# Altium PCB testbobot.PcbDoc
Units mil, origin at the board's own origin, x right, y up, seen from the top; angles counter-clockwise.
Board outline 3937.01 x 3937.01 mil, 2 copper layers (Top Layer, Bottom Layer); 55 components, 47 nets, 221 pads, 0 vias.
Unrouted connection lines stored in the file: 145.
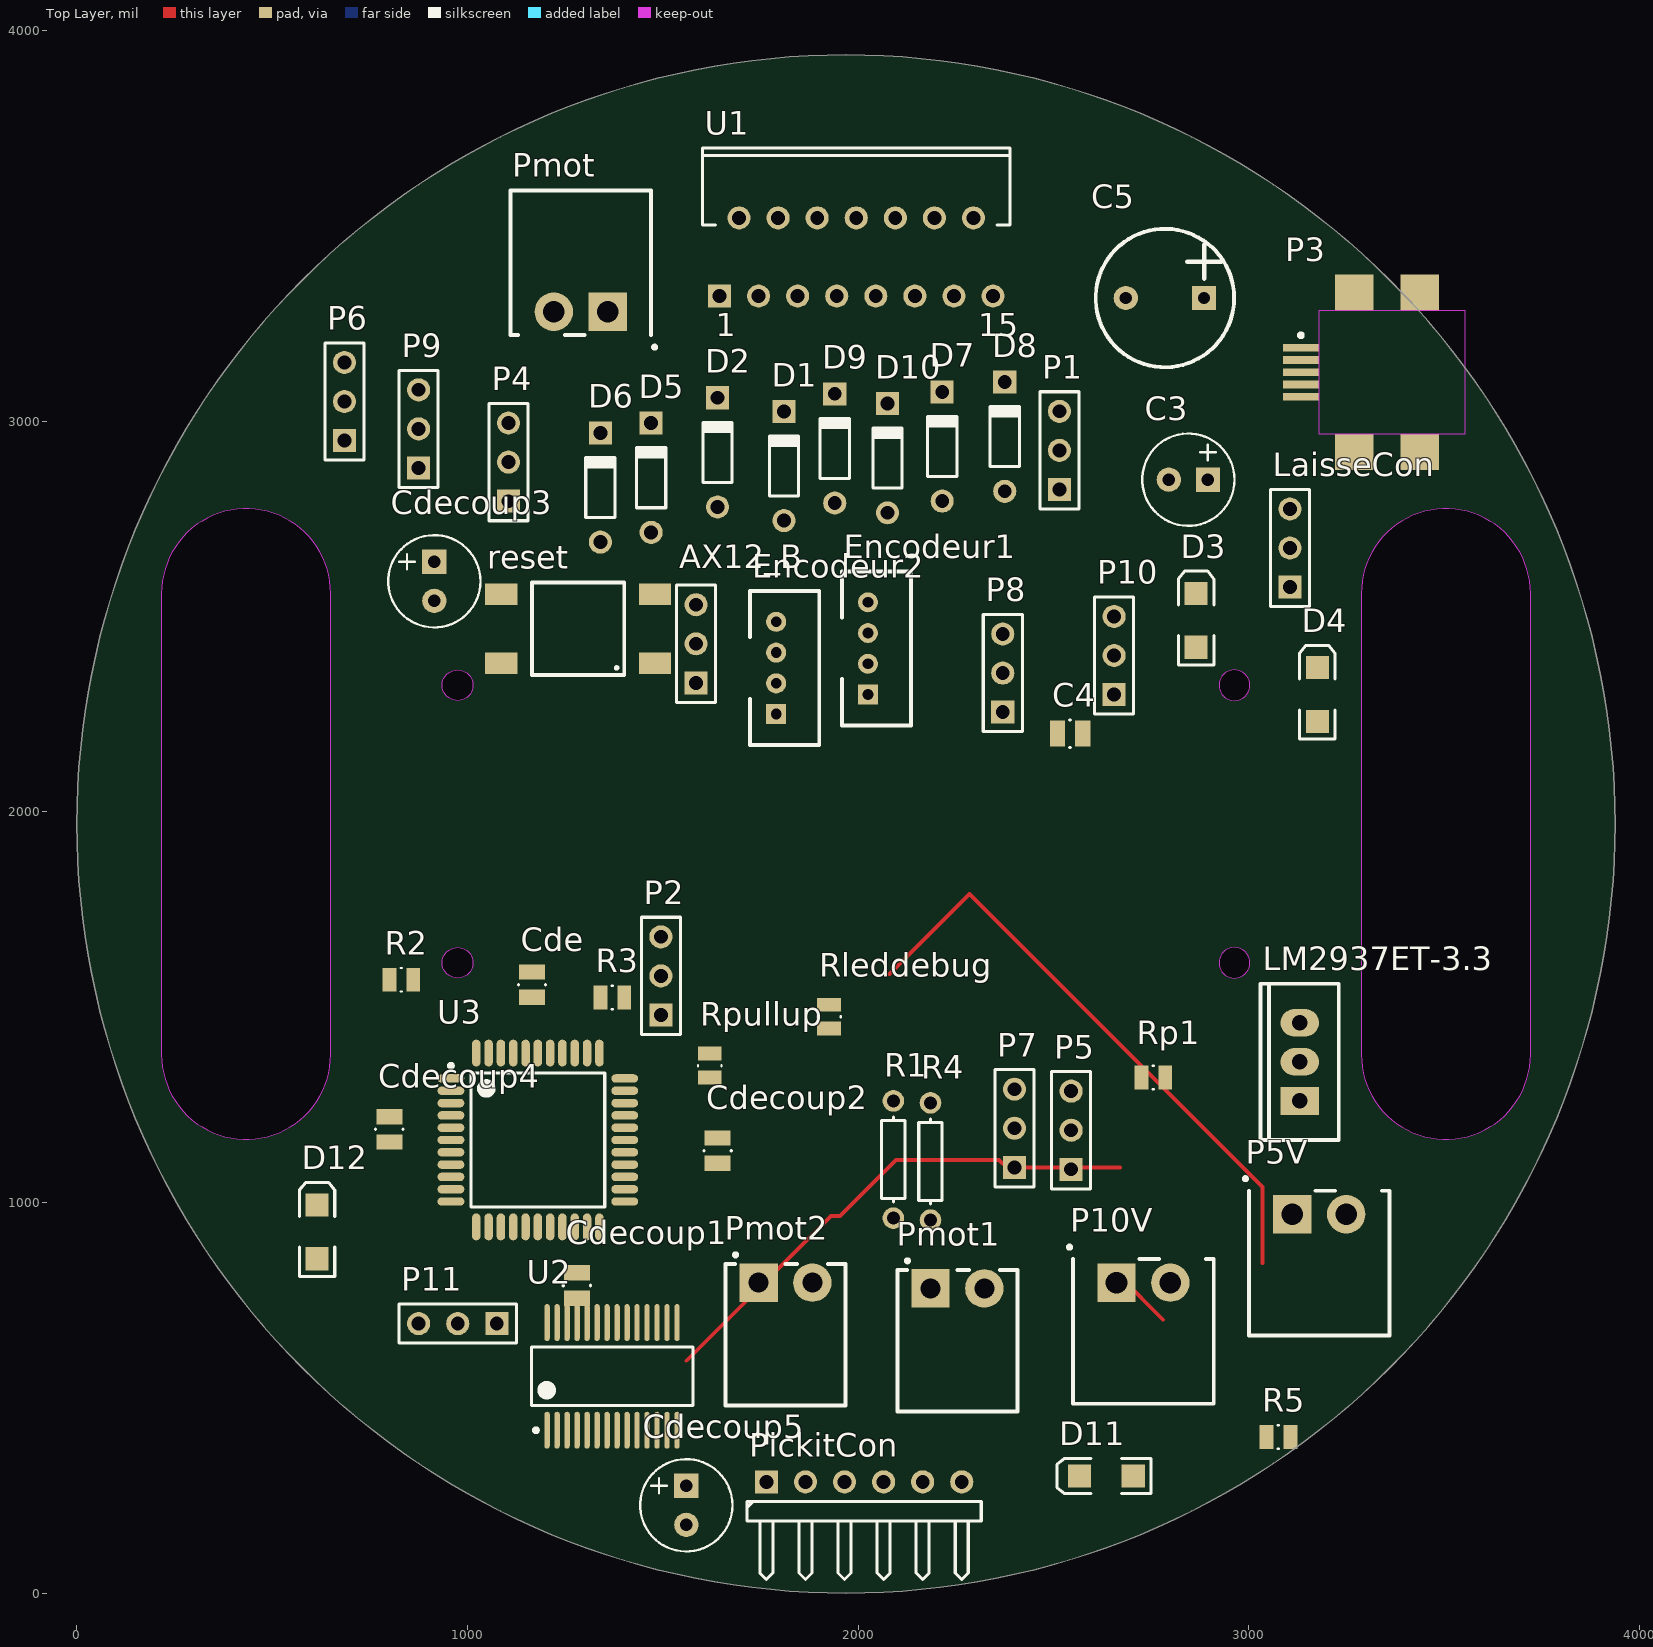
[diagram p0: Top Layer view]
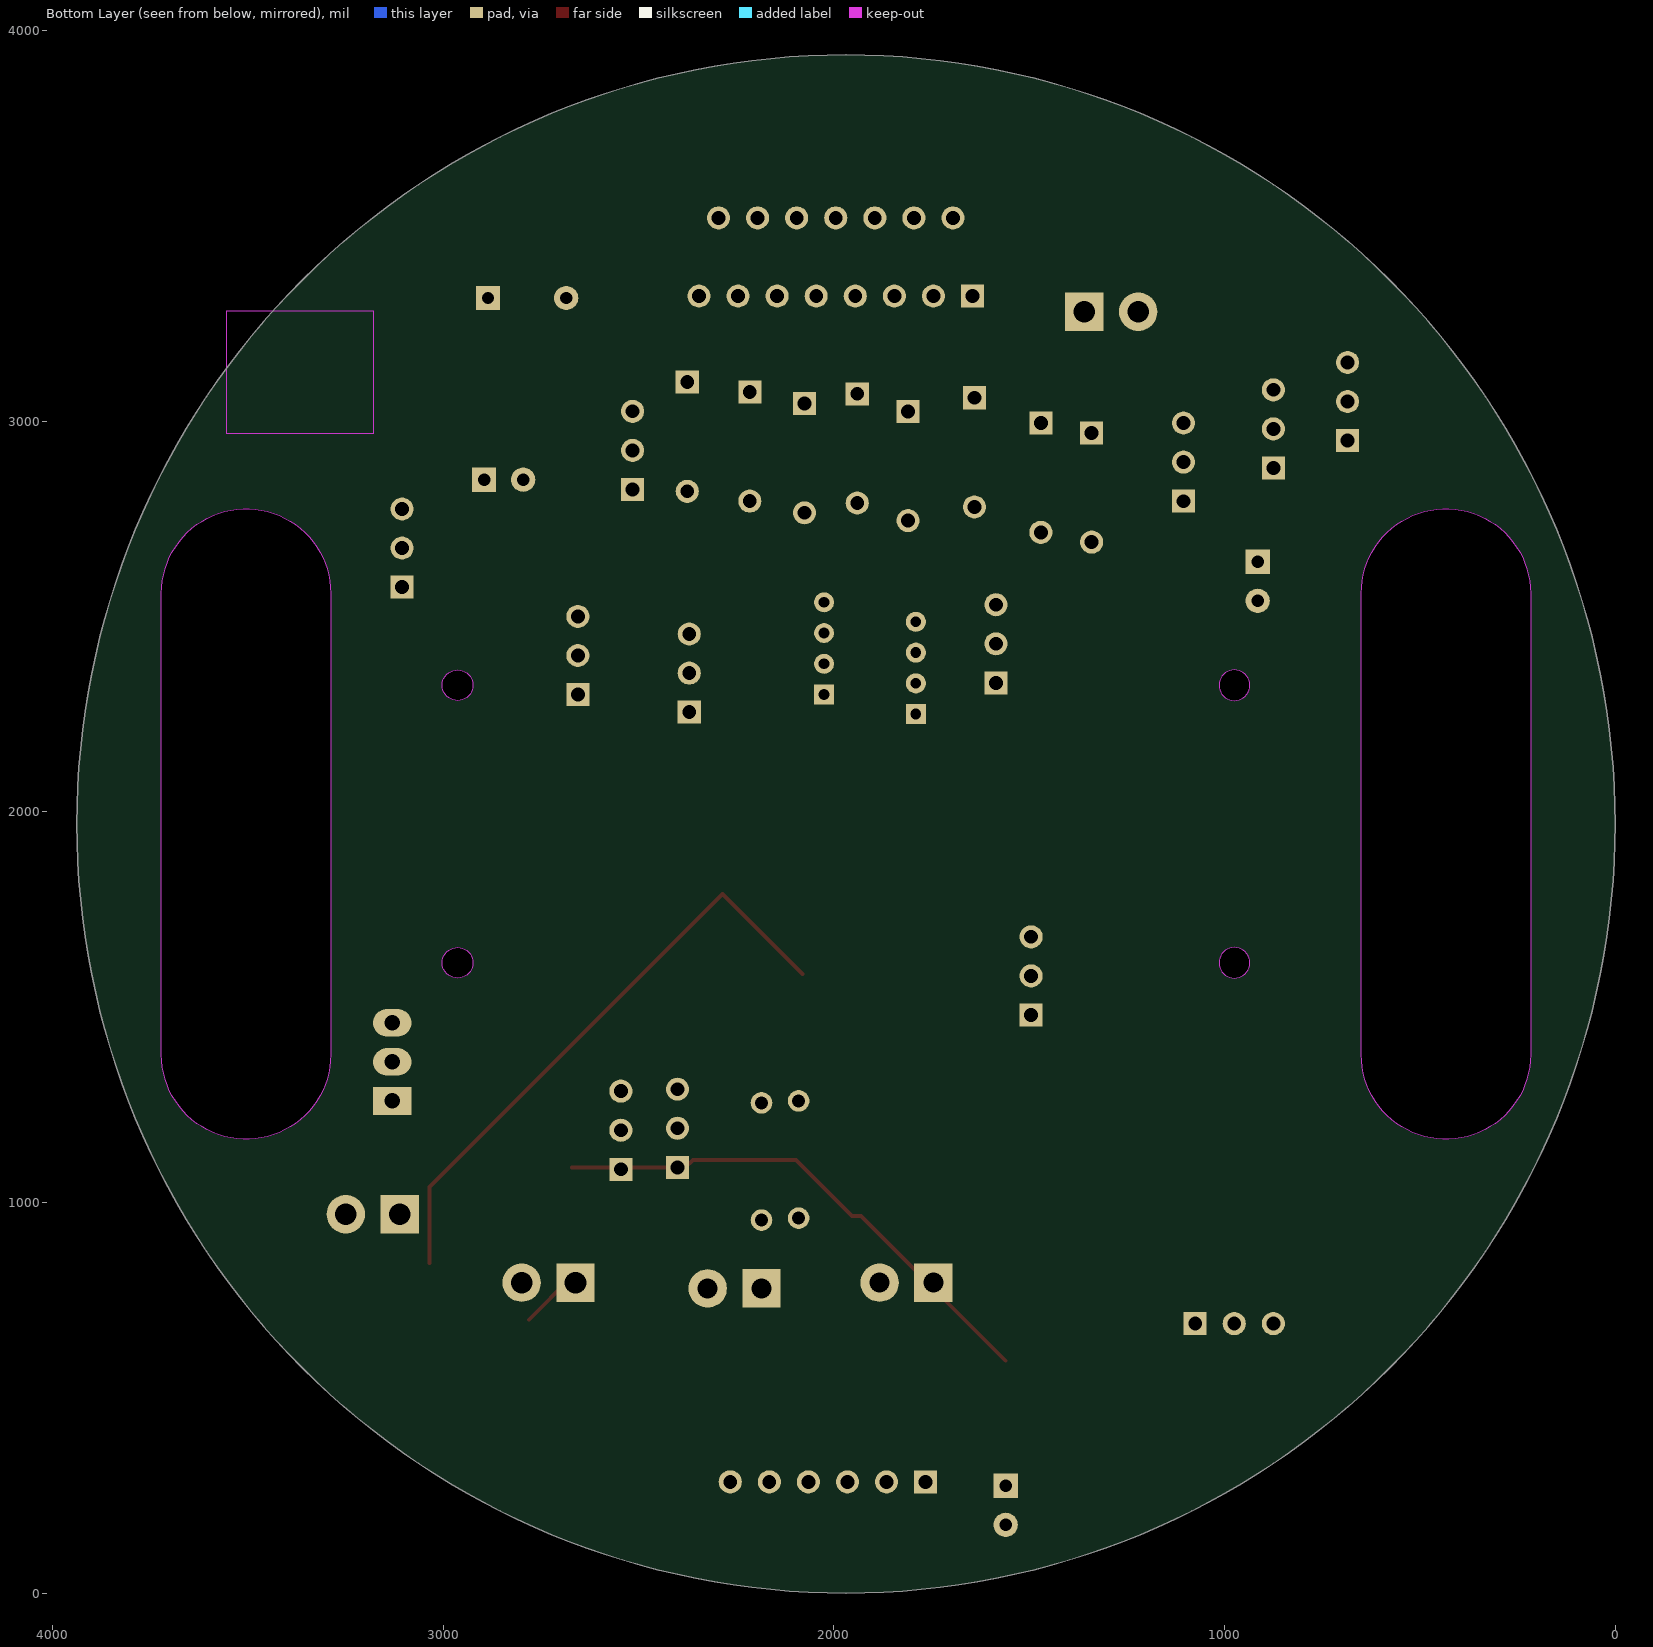
[diagram p1: Bottom Layer view, seen from below]

## Layer stack, top to bottom
Top Solder: solder mask 0.4, Solder Resist, Dk 3.5
Top Layer: signal copper 1.4
Dielectric 1: dielectric 12.6, FR-4, Dk 4.8
Bottom Layer: signal copper 1.4
Bottom Solder: solder mask 0.4, Solder Resist, Dk 3.5

## Board outline
1968.76,0.25 cw(c1968.76,1968.76) 0.25,1968.76 cw(c1968.76,1968.76) 1968.76,3937.26 cw(c1968.76,1968.76) 3937.26,1968.76 cw(c1968.76,1968.76)
cut-out: 974.66,1574.22 cw(c974.66,1613.59) 935.29,1613.59 cw(c974.66,1613.59) 974.66,1652.96 cw(c974.66,1613.59) 1014.03,1613.59 cw(c974.66,1613.59)
cut-out: 974.66,2284.55 cw(c974.66,2323.92) 935.29,2323.92 cw(c974.66,2323.92) 974.66,2363.29 cw(c974.66,2323.92) 1014.03,2323.92 cw(c974.66,2323.92)
cut-out: 3287.65,1378.2 ccw(c3504.19,1378.2) 3720.72,1378.2 3720.72,2559.31 ccw(c3504.19,2559.31) 3287.65,2559.31
cut-out: 2923.48,1613.59 ccw(c2962.85,1613.59) 2962.85,1574.22 ccw(c2962.85,1613.59) 3002.22,1613.59 ccw(c2962.85,1613.59) 2962.85,1652.96 ccw(c2962.85,1613.59)
cut-out: 2923.48,2323.92 ccw(c2962.85,2323.92) 2962.85,2284.55 ccw(c2962.85,2323.92) 3002.22,2323.92 ccw(c2962.85,2323.92) 2962.85,2363.29 ccw(c2962.85,2323.92)
cut-out: 216.79,1378.2 ccw(c433.32,1378.2) 649.86,1378.2 649.86,2559.31 ccw(c433.32,2559.31) 216.79,2559.31

## Design rules (kind name [scope] priority, off if disabled: settings)
Clearance [All] p1: gap=10
PolygonConnect [All] p1: connectstyle=Relief reliefconductorwidth=10 reliefentries=4 polygonreliefangle="90 Angle" airgapwidth=10
RoutingVias [All] p1: holewidth=28 width=50 viastyle="Through Hole" minholewidth=28 minwidth=50 maxholewidth=28 maxwidth=50
SolderMaskExpansion [All] p1: expansion=4
Width [All] p1: maxlimit=10 minlimit=10 preferedwidth=10
29 further rules are at their usual default settings.

## Classes and differential pairs
component class motherpetit: AX12_B C4 Cde Cdecoup1 Cdecoup2 Cdecoup3 Cdecoup4 Cdecoup5 D3 D4 D11 D12 Encodeur1 Encodeur2 LaisseCon LM2937ET-3.3 P1 P2 P3 P4 P5 P6 P7 P8 P9 P10 P11 PickitCon R2 R3 R5 reset Rleddebug Rp1 Rpullup U2 U3
component class Hbridge: C3 C5 D1 D2 D5 D6 D7 D8 D9 D10 P5V P10V Pmot Pmot1 Pmot2 R1 R4 U1

## Components (designator, comment, footprint, x,y, rotation, side; value= is the part's Value field where it differs from the comment)
AX12_B "Header 3" HDR1X3 1585,2330 r90 top
C3 "CAP Pol" RB.1/.3 2895,2850 r0 top
C4 "" C0805C 2510,2200 r0 top
C5 "CAP Pol" RB.2/.4 2885,3315 r0 top
Cde "CAP" C0805C 1165,1525 r90 top
Cdecoup1 "CAP" C0805C 1280,755 r90 top
Cdecoup2 "CAP" C0805C 1640,1100 r90 top
Cdecoup3 "CAP Pol" RB.1/.3 915,2640 r90 top
Cdecoup4 "CAP" C0805C 800,1155 r90 top
Cdecoup5 "CAP Pol" RB.1/.3 1560,275 r90 top
D1 "Diode 1N914" DO-35 1810,2885 r90 top
D2 "Diode 1N914" DO-35 1640,2920 r90 top
D3 "LED2" LED1206Y 2865,2490 r90 top
D4 "LED2" LED1206Y 3175,2300 r90 top
D5 "Diode 1N914" DO-35 1470,2855 r90 top
D6 "Diode 1N914" DO-35 1340,2830 r90 top
D7 "Diode 1N914" DO-35 2215,2935 r90 top
D8 "Diode 1N914" DO-35 2375,2960 r90 top
D9 "Diode 1N914" DO-35 1940,2930 r90 top
D10 "Diode 1N914" DO-35 2075,2905 r90 top
D11 "LED" LED1206R 2635,300 r180 top
D12 "LED" LED1206G 615,925 r90 top
Encodeur1 "JST" B4B-PH-K-S 2025,2300 r90 top
Encodeur2 "JST" B4B-PH-K-S 1790,2250 r90 top
LaisseCon "Header 3" HDR1X3 3105,2575 r90 top
LM2937ET-3.3 "LM2937ET-3.3" TO-220V 3130,1260 r180 top
P1 "Header 3" HDR1X3 2515,2825 r90 top
P2 "Header 3" HDR1X3 1495,1480 r90 top
P3 "USB" USB/SM0.8-4H5 3285,3125 r0 top
P4 "Header 3" HDR1X3 1105,2795 r90 top
P5 "Header 3" HDR1X3 2545,1085 r90 top
P5V "Header 2" "Bornier male coude 2 voies" 3180,970 r0 top
P6 "Header 3" HDR1X3 685,2950 r90 top
P7 "Header 3" HDR1X3 2400,1090 r90 top
P8 "Header 3" HDR1X3 2370,2255 r90 top
P9 "Header 3" HDR1X3 875,2880 r90 top
P10 "Header 3" HDR1X3 2655,2300 r90 top
P10V "Header 2" "Bornier male coude 2 voies" 2730,795 r0 top
P11 "Header 3" HDR1X3 1075,690 r180 top
PickitCon "PICkit" HDR1X6H 1765,285 r0 top
Pmot "Header 2" "Bornier male coude 2 voies" 1290,3280 r180 top
Pmot1 "Header 2" TERM2W-3.5 2185,780 r0 top
Pmot2 "Header 2" TERM2W-3.5 1745,795 r0 top
R1 "Res1" AXIAL-0.3 2090,1110 r90 top
R2 "" C0805R 800,1570 r0 top
R3 "" C0805R 1340,1525 r0 top
R4 "Res1" AXIAL-0.3 2185,1105 r90 top
R5 "RES" C0805R 3045,400 r0 top
reset "SPST-NO" SPST-NO 1480,2380 r90 top
Rleddebug "" C0805R 1925,1445 r90 top
Rp1 "RES" C0805R 2725,1320 r0 top
Rpullup "RES" C0805R 1620,1320 r90 top
U1 "L298N" Multiwatt15V 1995,3420 r0 top
U2 "FT232RL" SSOP-28_M 1370,555 r90 top
U3 "dsPIC33FJ64MC804-I/PT" TQFP-PT44_N 1180,1160 r0 top

## Footprints (in the part's own frame and the unit in brackets; to place one, negate y for a bottom-side part, rotate by r counter-clockwise, add the part's x,y. Pads: shape width x height; smd on the part's side, far side on the other; paste and mask are expansions set on the pad)
AXIAL-0.3 [mm] "Axial Device, Thru-Hole; 2 Leads; 0.3 in Pin Spacing"
  round 1.4 hole 0.85: 1(-3.81,0) 2(3.81,0)
  silkscreen extent -2.77,-0.76 2.77,0.76
B4B-PH-K-S [mm] "JST Header 4 pins Straight"
  rect 1.3x1.3 hole 0.7: 1(0,0)
  round 1.3 hole 0.7: 2(2,0) 3(4,0) 4(6,0)
  silkscreen extent -2,-2.8 8,1.7, body extent -1.95,-2.8 7.95,1.7, height 6
"Bornier male coude 2 voies" [mm] "Bornier male coude 2 voies 12A. Pas 5mm (model : CTB9350/2A) -- 3D FAUSSE"
  rect 2.5x2.5 hole 1.4: 1(-1.75,0)
  round 2.5 hole 1.4: 2(1.75,0)
  silkscreen extent -4.9,-7.87 4.57,2.41, body extent -4.2,-7.93 4.2,1.27, height 7.25
C0805C [mm]
  rect 1x1.7 smd: 1(0,0) 2(1.65,0)
  silkscreen extent 0.8,-0.89 0.85,0.89, body extent -0.21,-0.61 1.79,0.64, height 0.78
C0805R [mm]
  rect 0.9x1.55 smd: 1(0,0) 2(1.55,0)
  silkscreen extent 0.73,-0.76 0.81,0.76, body extent -0.24,-0.62 1.76,0.63, height 0.78
DO-35 [mm] "Diode, Axial; Body 3.8 x 1.9 mm (LxDia. max), Lead Dia. 0.53 mm (max)"
  round 1.5 hole 0.9: 1(-3.55,0)
  rect 1.5x1.5 hole 0.9: 2(3.55,0)
  silkscreen extent -1.95,-0.95 2.05,0.95
HDR1X3 [mm] "Connector; Header; 3 Position"
  rect 1.5x1.5 hole 0.9: 1(0,0)
  round 1.5 hole 0.9: 2(2.54,0) 3(5.08,0)
  silkscreen extent -1.27,-1.27 6.35,1.27
HDR1X6H [mm] "Connector; Header; 6 Position; Right Angle"
  rect 1.5x1.5 hole 0.9: 1(0,0)
  round 1.5 hole 0.9: 2(2.54,0) 3(5.08,0) 4(7.62,0) 5(10.16,0) 6(12.7,0)
  silkscreen extent -1.27,-6.35 13.97,-1.27
LED1206G [mm] "SMT LED; 2 Flat Leads; 3.2X1.6X1.1"
  rect 1.5x1.5 smd: 1(-1.75,0) 2(1.75,0)
  silkscreen extent -2.9,-1.15 3.2,1.15, body extent -1.6,-0.8 1.6,0.8, height 1.11
LED1206R [mm] "SMT LED; 2 Flat Leads; 3.2X1.6X1.1"
  rect 1.5x1.5 smd: 1(-1.75,0) 2(1.75,0)
  silkscreen extent -2.9,-1.15 3.2,1.15, body extent -1.6,-0.8 1.6,0.8, height 1.11
LED1206Y [mm] "SMT LED; 2 Flat Leads; 3.2X1.6X1.1"
  rect 1.5x1.5 smd: 1(-1.75,0) 2(1.75,0)
  silkscreen extent -2.9,-1.15 3.2,1.15, body extent -1.6,-0.8 1.6,0.8, height 1.11
Multiwatt15V [mm] "TO, Thru-Hole, Vertical, Heatsink Mounted; 15 Bent Staggered Leads; Pitch 1.27 mm"
  rect 1.5x1.5 hole 0.9: 1(-8.89,-2.54)
  round 1.5 hole 0.9: 2(-7.62,2.54) 3(-6.35,-2.54) 4(-5.08,2.54) 5(-3.81,-2.54) 6(-2.54,2.54) 7(-1.27,-2.54) 8(0,2.54) 9(1.27,-2.54) 10(2.54,2.54) 11(3.81,-2.54) 12(5.08,2.54) 13(6.35,-2.54) 14(7.62,2.54) 15(8.89,-2.54)
  silkscreen extent -10,2.09 10,7.09
RB.1/.3 [mil]
  rect 62x62 hole 31.5: 1(0,0)
  round 62 hole 31.5: 2(-100,0)
  silkscreen extent -168,-118 68,118
RB.2/.4 [mil]
  rect 62x62 hole 31.5: 1(0,0)
  round 62 hole 31.5: 2(-200,0)
  silkscreen extent -277,-177 77,177, body extent -298,-194 95,200, height 650
SPST-NO [mm] "Tactile Switch SPST-NO 6x6mm"
  rect 1.4x2.1 smd: 1(0,0) 2(4.5,0) 3(4.5,10) 4(0,10)
  silkscreen extent -0.75,2 5.25,8, body extent -0.75,0.93 5.25,9.08, height 5
SSOP-28_M [mm] "SOP, 28-Leads, Body 10.2x5.3mm, Pitch 0.65mm, IPC Low Density"
  oval 2.4x0.35 smd: 1(-3.5,4.225) 2(-3.5,3.575) 3(-3.5,2.925) 4(-3.5,2.275) 5(-3.5,1.625) 6(-3.5,0.975) 7(-3.5,0.325) 8(-3.5,-0.325) 9(-3.5,-0.975) 10(-3.5,-1.625) 11(-3.5,-2.275) 12(-3.5,-2.925) 13(-3.5,-3.575) 14(-3.5,-4.225) 15(3.5,-4.225) 16(3.5,-3.575) 17(3.5,-2.925) 18(3.5,-2.275) 19(3.5,-1.625) 20(3.5,-0.975) 21(3.5,-0.325) 22(3.5,0.325) 23(3.5,0.975) 24(3.5,1.625) 25(3.5,2.275) 26(3.5,2.925) 27(3.5,3.575) 28(3.5,4.225)
  silkscreen extent -3.62,-5.25 1.9,5.25, body extent -2.8,-5.25 2.8,5.25, height 2
TERM2W-3.5 [mm] "Horizontal Terminal Block, 2 ways, 3.5mm; Model 20.155MH/2"
  rect 2.5x2.5 hole 1.3: 1(0,0)
  round 2.5 hole 1.3: 2(3.5,0)
  silkscreen extent -2.15,-8 5.65,1.9, body extent -2.45,-8 5.95,1.2, height 7.25
TO-220V [mm]
  rect 2.5x1.8 hole 1: 1(0,0)
  oval 2.5x1.8 hole 1: 2(0,-2.54) 3(0,-5.08)
  silkscreen extent -2.54,-7.62 2.54,2.54
TQFP-PT44_N [mm] "Thin QFP, 44-Leads, Body 10x10mm, Pitch 0.8mm, IPC Medium Density"
  oval 1.75x0.55 smd: 1(-5.65,4) 2(-5.65,3.2) 3(-5.65,2.4) 4(-5.65,1.6) 5(-5.65,0.8) 6(-5.65,0) 7(-5.65,-0.8) 8(-5.65,-1.6) 9(-5.65,-2.4) 10(-5.65,-3.2) 11(-5.65,-4) 23(5.65,-4) 24(5.65,-3.2) 25(5.65,-2.4) 26(5.65,-1.6) 27(5.65,-0.8) 28(5.65,0) 29(5.65,0.8) 30(5.65,1.6) 31(5.65,2.4) 32(5.65,3.2) 33(5.65,4)
  oval 0.55x1.75 smd: 12(-4,-5.65) 13(-3.2,-5.65) 14(-2.4,-5.65) 15(-1.6,-5.65) 16(-0.8,-5.65) 17(0,-5.65) 18(0.8,-5.65) 19(1.6,-5.65) 20(2.4,-5.65) 21(3.2,-5.65) 22(4,-5.65) 34(4,5.65) 35(3.2,5.65) 36(2.4,5.65) 37(1.6,5.65) 38(0.8,5.65) 39(0,5.65) 40(-0.8,5.65) 41(-1.6,5.65) 42(-2.4,5.65) 43(-3.2,5.65) 44(-4,5.65)
  silkscreen extent -5.77,-4.35 4.35,4.95, body extent -5,-5 5,5, height 1.2
USB/SM0.8-4H5 [mm] "Connector; USB Mini-B, Sinking Type, SM; 5 Position; Right Angle"
  rect 2.35x0.5 smd: 1(-3.862,1.6) 2(-3.862,0.8) 3(-3.862,0) 4(-3.862,-0.8) 5(-3.862,-1.6)
  rect 2.5x2.35 smd: MH1(-0.387,-5.175) MH2(3.863,-5.175) MH3(3.863,5.175) MH4(-0.387,5.175)
  Keep-Out Layer region: -2.687,-4 6.813,-4 6.813,4 -2.687,4
  silkscreen extent -3.99,2.28 -3.74,2.52, body extent -1.8,-3.84 6.8,3.86, height 0.65

## Part data
AX12_B LaisseCon P1 P2 P4 P5 P6 P7 P8 P9 P10 P11: "Header, 3-Pin"
C3 C5 Cdecoup3 Cdecoup5: "Polarized Capacitor"
C4: library part "Cap Semi", "Capacitor (Semiconductor SIM Model)"
Cde Cdecoup1 Cdecoup2 Cdecoup4: "Capacitor"
D1 D2 D5 D6 D7 D8 D9 D10: "High Conductance Fast Diode"
D3 D4: "Typical RED, GREEN, YELLOW, AMBER GaAs LED"
D11 D12: "Typical LED"
Encodeur1 Encodeur2: library part "Header 4", "Header, 4-Pin"
LM2937ET-3.3: "3.3V linear Regulator"
P3: library part "USB Con", "USB Connector"
P5V P10V Pmot Pmot1 Pmot2: "Header, 2-Pin"
PickitCon: library part "Header ICSP", "Header, 6-Pin, Right Angle"
R1 R4 R5 Rp1 Rpullup: "Resistor"
R2 R3 Rleddebug: library part Res3, "Resistor"
reset: "Tactile Switch 7.3mm, SMD"
U1: "Dual Full Bridge Driver"
U2: "USB UART Asynchronous Serial Data Transfer Chip, SSOP-28, Tube"
U3: "High-Performance 16-bit Digital Signal Controller, 64 KB Flash, 16 KB RAM, 44-Pin TQFP, Industrial Temperature"

## Nets (pads, with @x,y where several pads share a name; then routed paths per layer and width w, separated by ;. In a path a pad name is that pad's centre, name@x,y a point inside that pad or via, vN(x,y) a via of type N, cw(c..) or ccw(c..) an arc to the next point about the centre after c; other vN are vias at no path point)
3V3: Cde.2 Cdecoup2.2 Cdecoup4.2 Cdecoup5.1 LaisseCon.3 LM2937ET-3.3.3 P8.3 P9.3 P10.3 P11.3 PickitCon.2 R2.2 R3.2 R5.1 Rp1.2 U2.4 U3.17 U3.28 U3.40
5V: Cdecoup3.1 Encodeur1.1 Encodeur2.1 LM2937ET-3.3.1 P1.3 P2.3 P3.1 P4.3 P5.3 P5V.1 P6.3 P7.3 Rpullup.1 U1.9 U2.20
10V: AX12_B.1 C3.1 P10V.1
A1: Encodeur1.3 U3.5
A2: Encodeur2.3 U3.3
B1: Encodeur1.4 U3.2
B2: Encodeur2.4 U3.4
DIR11: U1.5 U3.9
DIR12: U1.7 U3.1
DIR21: U1.10 U3.11
DIR22: U1.12 U3.14
DM: P3.2 U2.16
DP: P3.3 U2.15
GND: AX12_B.3 C3.2 C4.1 C5.2 Cde.1 Cdecoup1.1 Cdecoup2.1 Cdecoup3.2 Cdecoup4.1 Cdecoup5.2 D7.1 D8.1 D9.1 D10.1 D11.2 D12.2 Encodeur1.2 Encodeur2.2 LaisseCon.2 LM2937ET-3.3.2 P1.2 P2.2 P3.4 P4.2 P5.2 P5V.2 P6.2 P7.2 P8.2 P9.2 P10.2 P10V.2 P11.2 PickitCon.3 Pmot.2 R1.1 R4.1 reset.1 reset.4 U1.1 U1.8 U1.15 U2.7 U2.18 U2.21 U2.25 U2.26 U3.6 U3.16 U3.29 U3.39 | length 155.9
  Top Layer w10: 2670,810.24 2780.24,700
IO1_5V: P2.1 U3.32
IO2_5V: P1.1 U3.35
IO3_5V: P4.1 U3.12
IO4_5V: P5.1 U3.36
IO5_5V: P6.1 U3.37
IO6_5V: P7.1 U3.38
IO_AN0: P11.1 U3.19
IO_AN6: P8.1 U3.25
IO_AN7: P9.1 U3.26
IO_AN8: P10.1 U3.27
LAISSE: LaisseCon.1 U3.20
MCLR: PickitCon.1 reset.2 reset.3 Rp1.1 U3.18
NetC4_2: C4.2 U2.17
NetCdecoup1_2: Cdecoup1.2 U3.7
NetD1_1: D1.1 D7.2 Pmot2.2 U1.14
NetD2_1: D2.1 D8.2 Pmot2.1 U1.13 | length 1331.1
  Top Layer w10: 1560,595 1930.71,965.71 1953.44,965.71 2097.03,1109.29 2360.74,1109.29 2380.27,1089.76 2670,1089.76
NetD3_1: D3.1 R2.1
NetD4_1: D4.1 R3.1
NetD5_1: D5.1 D9.2 Pmot1.2 U1.3
NetD6_1: D6.1 D10.2 Pmot1.1 U1.2
NetD11_1: D11.1 R5.2
NetD12_1: D12.1 Rleddebug.2
NetRleddebug_1: Rleddebug.1 U3.30
PGEC: PickitCon.5 U3.22
PGED: PickitCon.4 U3.21
PWM1H2: R4.2 U1.11 U3.10
PWM1H3: R1.2 U1.6 U3.8
RX: U2.1 U3.23
RXLED: D3.2 U2.23
TX: U2.5 U3.24
TXLED: D4.2 U2.22
UARTAX: AX12_B.2 Rpullup.2 U3.41
VMOT: C5.1 D1.2 D2.2 D5.2 D6.2 Pmot.1 U1.4
pads on no net: P3.5 P3.MH1 P3.MH2 P3.MH3 P3.MH4 PickitCon.6 U2.2 U2.3 U2.6 U2.8 U2.9 U2.10 U2.11 U2.12 U2.13 U2.14 U2.19 U2.24 U2.27 U2.28 U3.13 U3.15 U3.31 U3.33 U3.34 U3.42 U3.43 U3.44
copper on no net: | length 1545.6
  Top Layer w10: 2080,1585 2285,1790 3035,1040 3035,845

## Silkscreen, mask and mechanical layers (free items; w line width, h text height)
Mechanical 1:
  circle w0.5: c974.66,2323.92 r39.37
  circle w0.5: c974.66,1613.59 r39.37
  circle w0.5: c1968.76,1968.76 r1968.51
  circle w0.5: c2962.85,2323.92 r39.37
  circle w0.5: c2962.85,1613.59 r39.37
  lines w0.5: 216.79,1378.2 ccw(c433.32,1378.2) 649.86,1378.2 649.86,2559.31 ccw(c433.32,2559.31) 216.79,2559.31 216.79,1378.2 ; 3287.65,1378.2 ccw(c3504.19,1378.2) 3720.72,1378.2 3720.72,2559.31 ccw(c3504.19,2559.31) 3287.65,2559.31 3287.65,1378.2

## Text inside footprints (layer, text, board x,y; h text height)
U1: Top Overlay "15" at 2307.6,3216.65 h59.06; Top Overlay "1" at 1635.94,3216.65 h59.06